# Altium PCB 5811-PA.PcbDoc
Units mil, origin at the board's own origin, x right, y up, seen from the top; angles counter-clockwise.
Board outline 1405.03 x 624.03 mil, 4 copper layers (Top Layer, Internal Plane 1, Signal Layer 1, Bottom Layer), stack 36.417 mil thick; 60 components, 41 nets, 187 pads, 77 vias.
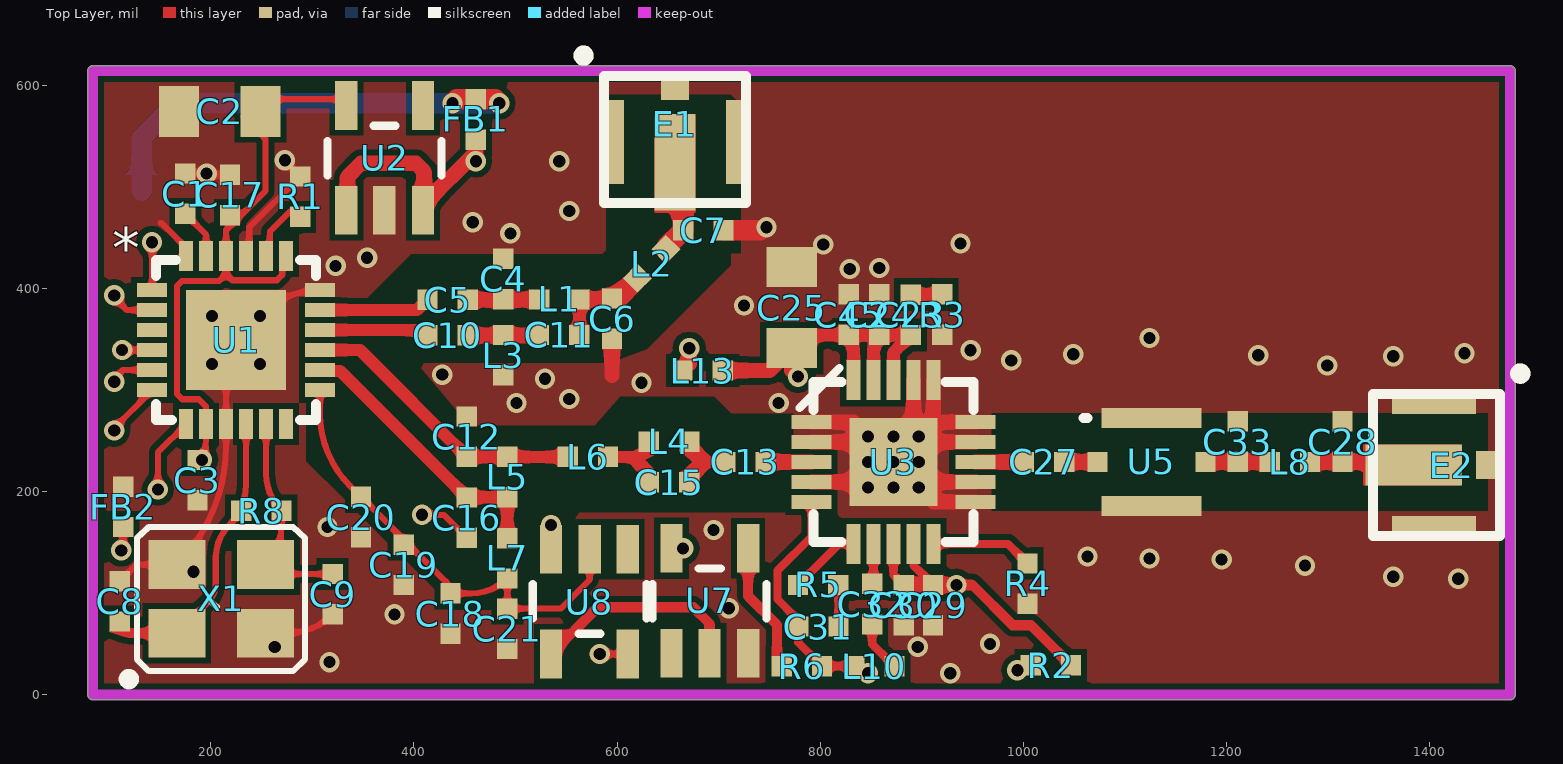
[diagram p0: Top Layer view]
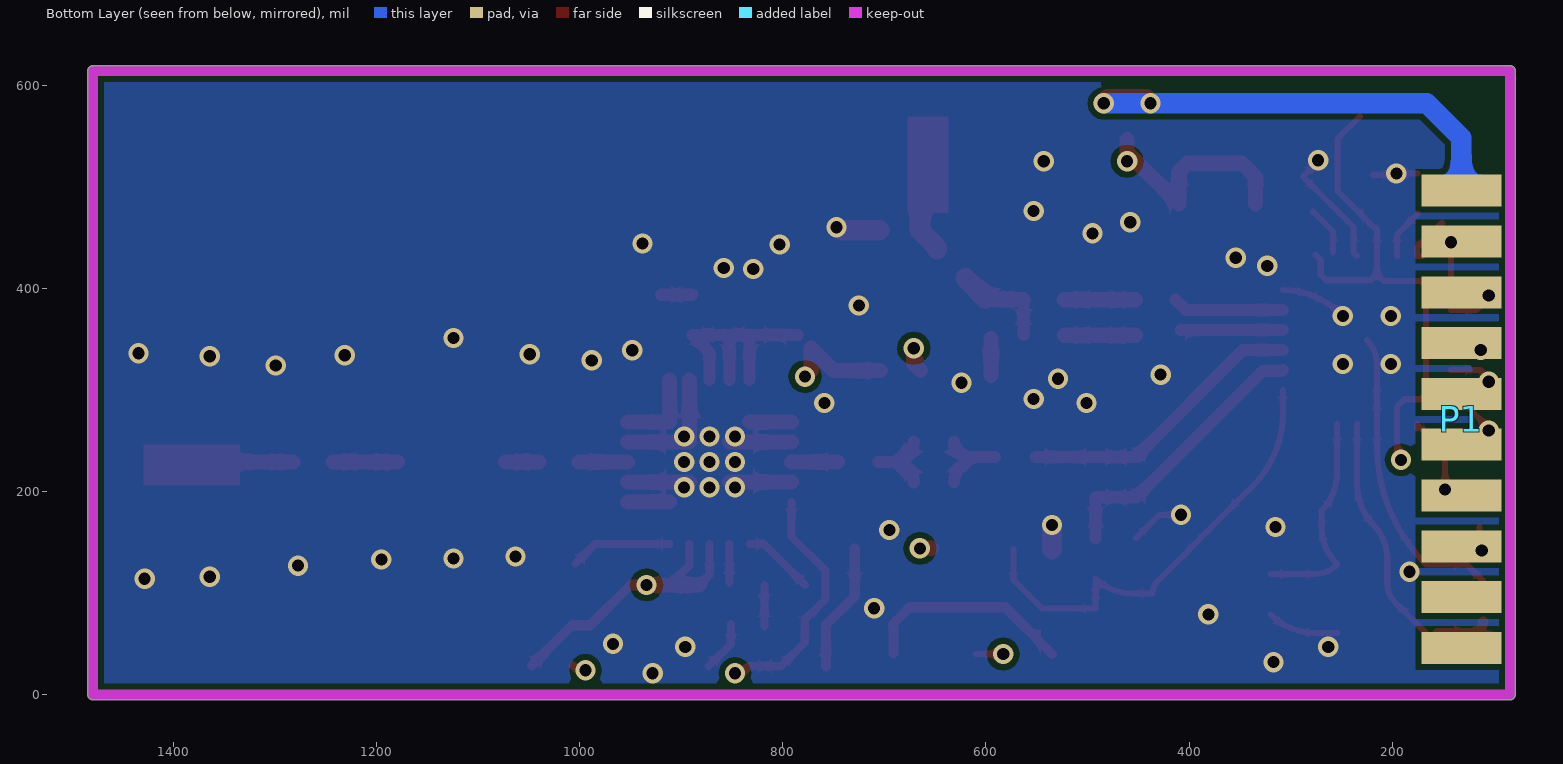
[diagram p1: Bottom Layer view, seen from below]
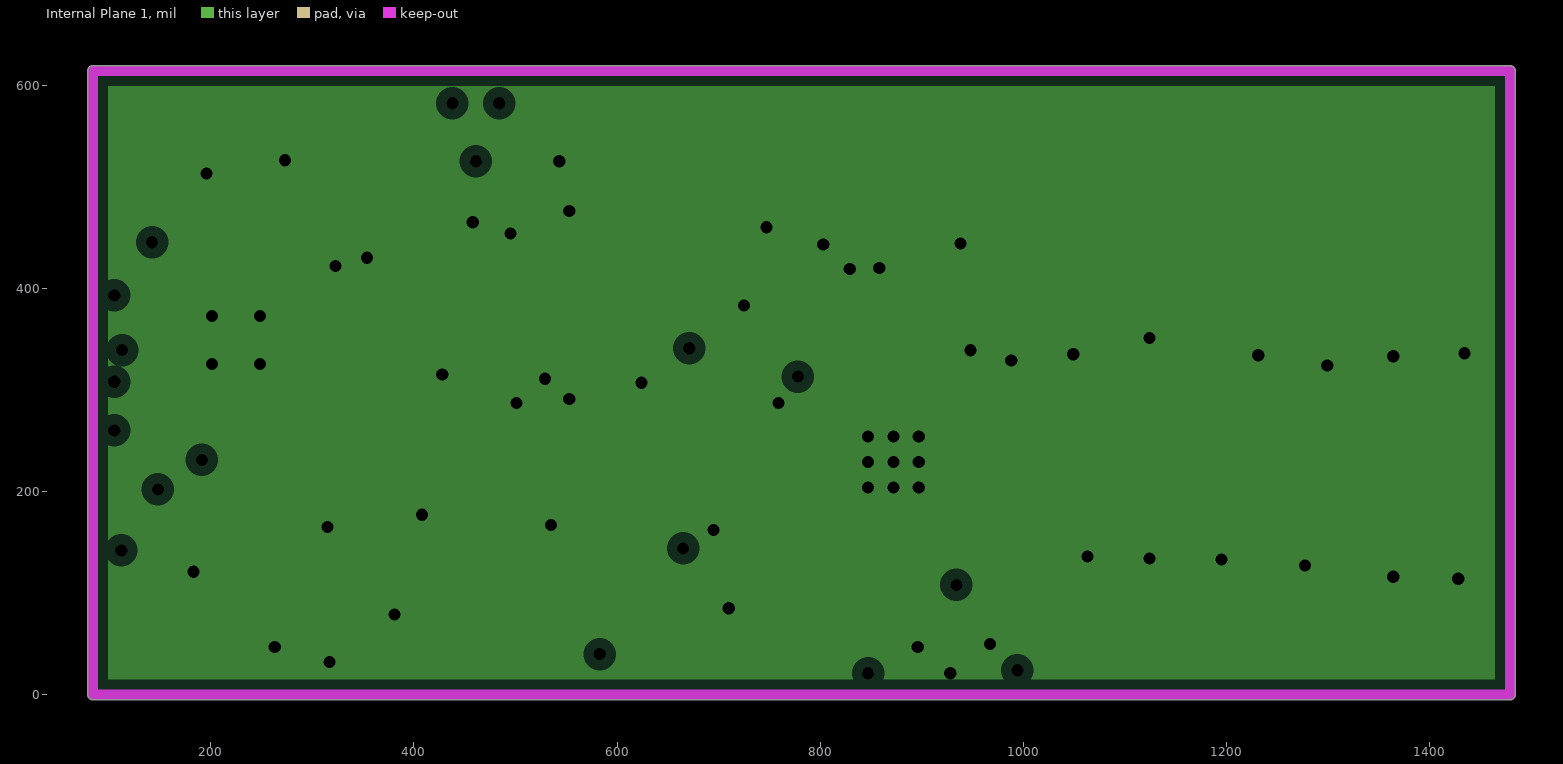
[diagram p2: Internal Plane 1, clearances drawn from the general rule]
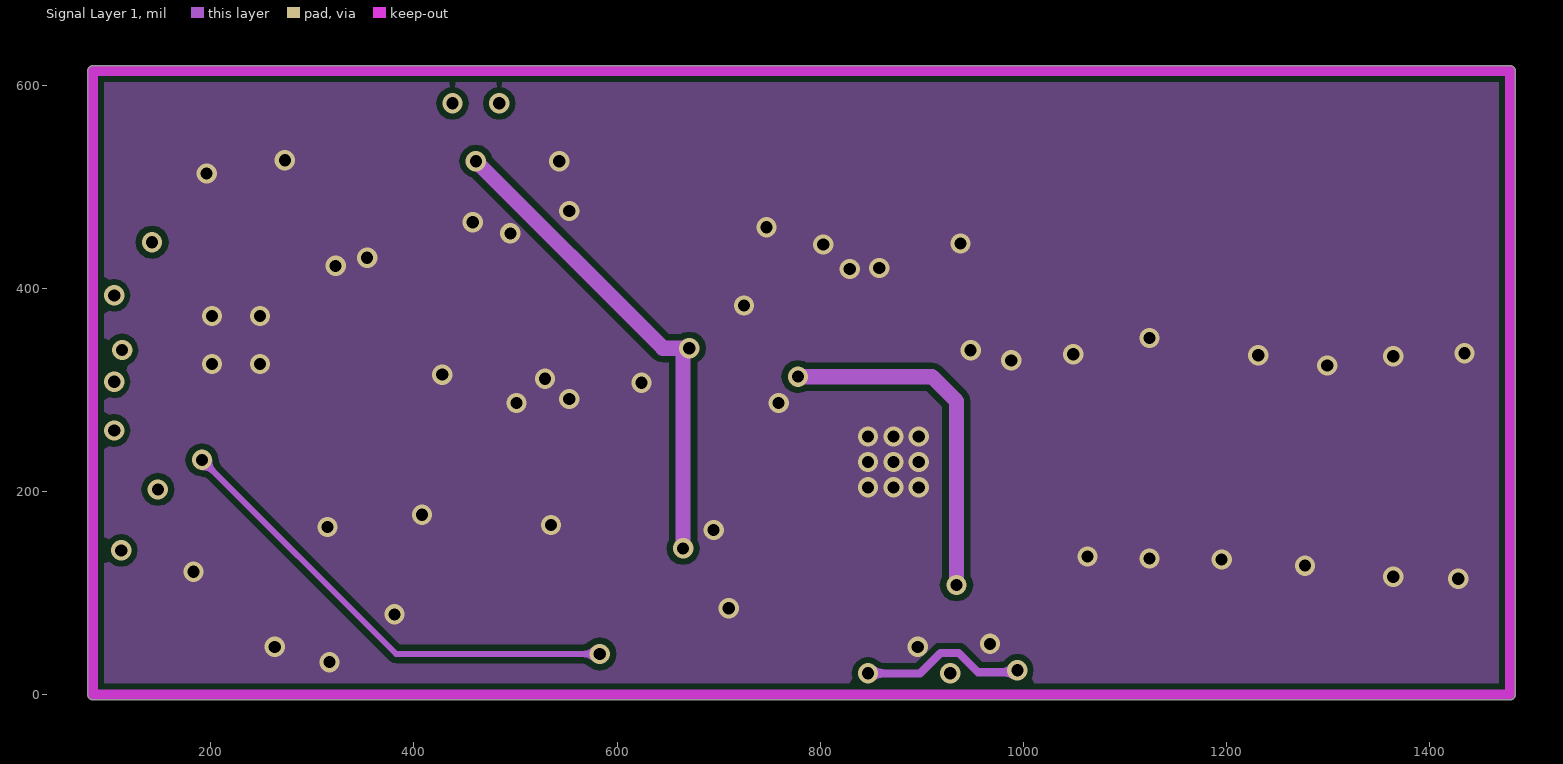
[diagram p3: Signal Layer 1]

## Layer stack, top to bottom
Top Solder: solder mask 0.4, Solder Resist, Dk 3.5
Top Layer: signal copper 0.689
Dielectric 1: prepreg 7.677, FR-4, Dk 4.2
Internal Plane 1: plane copper 0.689, net GND
Dielectric 2: core 18.307, Dk 4.2
Signal Layer 1: signal copper 0.689
Dielectric 3: prepreg 7.677, Dk 4.2
Bottom Layer: signal copper 0.689
Bottom Solder: solder mask 0.4, Solder Resist, Dk 3.5

## Board outline
78.99,0 ccw(c84,0) 84,-5.01 1479,-5.01 ccw(c1479,0) 1484.02,0 1484.02,614 ccw(c1479,614) 1479,619.01 84,619.01 ccw(c84,614) 78.99,614

## Design rules (kind name [scope] priority, off if disabled: settings)
Clearance [All] p1: gap=6
MinimumSolderMaskSliver [All] p1 off: minsoldermaskwidth=10
PlaneClearance [All] p1: clearance=10
PlaneConnect [All] p1: planeconnectstyle=Direct reliefexpansion=20 reliefentries=4 reliefconductorwidth=10 reliefairgap=10
PolygonConnect [All] p1: connectstyle=Direct reliefconductorwidth=10 reliefentries=4 polygonreliefangle="90 Angle" airgapwidth=10
RoomDefinition PA [InComponentClass('PA')] p1 off: confinementstyle=ConfineIn formatcopy=TRUE lockcomponents=FALSE outline 3450,-1911 3670,-1911 3670,-1611 3450,-1611
RoomDefinition BK5811 [InComponentClass('BK5811')] p2 off: confinementstyle=ConfineIn formatcopy=TRUE lockcomponents=FALSE outline 3450,-2291 9750,-2291 9750,-1961 3450,-1961
RoutingVias [All] p1: holewidth=12 width=25 viastyle="Through Hole" minholewidth=12 minwidth=20 maxholewidth=28 maxwidth=50
SilkToSilkClearance [All] p1 off: silktosilkclearance=10
SilkToSolderMaskClearance [IsPad] p1 off: minsilkscreentomaskgap=10 clearancetoexposedcopper=TRUE
SolderMaskExpansion [All] p1: expansion=4
UnpouredPolygon [All] p1: allowunpoured=FALSE
Width [All] p1: maxlimit=20 minlimit=6 preferedwidth=10
24 further rules are at their usual default settings.

## Classes and differential pairs
component class BK5811: C1 C2 C3 C4 C5 C6 C7 C8 C9 C10 C11 C12 C13 C15 C16 C17 C18 C19 C20 C21 FB1 FB2 L1 L2 L3 L4 L5 L6 L7 P1 R1 R8 U1 X1
component class PA: C23 C24 C25 C27 C28 C29 C30 C31 C32 C33 C45 E1 E2 L8 L10 L13 R2 R3 R4 R5 R6 U2 U3 U5 U7 U8

## Components (designator, comment, footprint, x,y, rotation, side; value= is the part's Value field where it differs from the comment)
C1 "33nF" 0402 175,493 r90 top
C2 "22uF" 0805 209,574 r0 top
C3 "0.1uF" 0402 187,211 r90 top
C4 "1pF" 0402 488,409 r90 top
C5 "1pF" 0402 433,388.68 r0 top
C6 "NC" 0402 595,370 r90 top
C7 "NC" 0402 685,457 r180 top
C8 "Cap" 0402 110.55,91.72 r90 top
C9 "Cap" 0402 320,99 r270 top
C10 "1pF" 0402 433,353.68 r0 top
C11 "1pF" 0402 543,354 r180 top
C12 "1pF" 0402 452,254 r270 top
C13 "1pF" 0402 726,229 r0 top
C15 "1pF" 0402 651,209 r0 top
C16 "1pF" 0402 452,174 r90 top
C17 "0.1uF" 0402 219,492 r270 top
C18 "1pF" 0402 436,80 r270 top
C19 "1pF" 0402 390,128 r270 top
C20 "1pF" 0402 348,175 r270 top
C21 "1pF" 0402 492,65 r270 top
C23 "Cap" 0402 889,374 r270 top
C24 "Cap" 0402 858,374 r90 top
C25 "Cap" 0805 772,381 r270 top
C27 "Cap" 0402 1020,229 r0 top
C28 "Cap" 0402 1314,249 r90 top
C29 "Cap" 0402 911,88 r90 top
C30 "Cap" 0402 882,88 r90 top
C31 "Cap" 0402 798,67 r0 top
C32 "Cap" 0402 851,89 r90 top
C33 "Cap" 0402 1211,249 r90 top
C45 "Cap" 0402 828,374 r90 top
E1 "Antenna" IPEX 657,544 r0 top
E2 "Antenna" IPEX 1404,226 r270 top
FB1 "Res2" 0402 461,566 r90 top
FB2 "Res2" 0402 114,185 r270 top
L1 "2nH" 0402 543,389 r0 top
L2 "0R/10P" 0402 634,424 r45 top
L3 "2nH" 0402 488,334 r90 top
L4 "2nH" 0402 651,249 r0 top
L5 "2nH" 0402 492,214 r90 top
L6 "2nH" 0402 571,234 r0 top
L7 "2nH" 0402 492,134 r90 top
L8 "Inductor" 0402 1262,229 r0 top
L10 "Inductor" 0402 853,28 r0 top
L13 "Inductor" 0402 684,319 r0 top
P1 "RFInf" "RFInf - SINGLESIDE" 132,496 r180 bottom
R1 "62K 1%" 0402 288,490 r90 top
R2 "Res2" 0402 1027,29 r180 top
R3 "Res2" 0402 920,374 r90 top
R4 "Res2" 0402 1004,109 r90 top
R5 "Res2" 0402 798,108 r180 top
R6 "Res2" 0402 782,28 r180 top
R8 "Res2" 0402 250,181 r180 top
U1 "BK5811" BK5811 225,349 r0 top
U2 "LP5907" SOT23-5 371,528 r0 top
U3 "SE5004L" SE5004L 872,229 r0 top
U5 "BF2012" LFB2H5 1126,229 r0 top
U7 "schmitt_sot23-5" SOT23-5 691,92 r0 top
U8 "schmitt_sot23-5" SOT23-5 573,92 r180 top
X1 "16Mhz" OSCILLATOR-3.2X2.5 210,94 r0 top

## Footprints (in the part's own frame and the unit in brackets; to place one, negate y for a bottom-side part, rotate by r counter-clockwise, add the part's x,y. Pads: shape width x height; smd on the part's side, far side on the other; paste and mask are expansions set on the pad)
0402 [mil] "0402-RES"
  rect 20x20 smd: 1(-19.68,0) 2(20,0)
0805 [mil]
  rect 39.37x50 smd: 1(-40,0) 2(40,0)
  body extent -50,-30 50,30, height 31
BK5811 [mm]
  rect 2.5x2.5 smd: 0(0,0)
  rect 0.75x0.35 smd: 1(-2.1,1.25) 2(-2.1,0.75) 3(-2.1,0.25) 4(-2.1,-0.25) 5(-2.1,-0.75) 6(-2.1,-1.25) 13(2.1,-1.25) 14(2.1,-0.75) 15(2.1,-0.25) 16(2.1,0.25) 17(2.1,0.75) 18(2.1,1.25)
  rect 0.35x0.75 smd: 7(-1.25,-2.1) 8(-0.75,-2.1) 9(-0.25,-2.1) 10(0.25,-2.1) 11(0.75,-2.1) 12(1.25,-2.1) 19(1.25,2.1) 20(0.75,2.1) 21(0.25,2.1) 22(-0.25,2.1) 23(-0.75,2.1) 24(-1.25,2.1)
  silkscreen extent -2,-2 2,2
IPEX [mil]
  rect 40x95 smd: 1(0,-20)
  rect 19.68x82.68 smd: 2(-60,0) 2(60,0)
  rect 27.56x27.56 smd: 2(0,55)
  Top Layer region: -20,-70 20,-70 20,25 -20,25
  silkscreen extent -95,-60 70,90
LFB2H5 [mm]
  rect 2.5x0.5 smd: 0(0,-1.1) 0(0,1.1)
  rect 0.5x0.5 smd: 1(-1.35,0) 2(1.35,0)
  silkscreen extent -1.7,1.1 -1.6,1.1, body extent -1.25,-1 1.25,1, height 0.9
OSCILLATOR-3.2X2.5 [mil] "OSCILLATOR-3.2X2.5"
  rect 56x48 smd: 1(-43.31,-33.46) 2(44,-33.46) 3(44,34) 4(-43.31,34)
  silkscreen extent -95,-83 83,71
"RFInf - SINGLESIDE" [mm]
  rect 2x0.8 smd: 1(0,0) 2(0,-1.27) 3(0,-2.54) 4(0,-3.81) 5(0,-5.08) 6(0,-6.35) 7(0,-7.62) 8(0,-8.89) 9(0,-10.16) 10(0,-11.43)
SE5004L [mm]
  rect 2.2x2.2 smd: 0(0,0)
  rect 1x0.35 smd: 1(-2.05,1) 2(-2.05,0.5) 3(-2.05,0) 4(-2.05,-0.5) 5(-2.05,-1) 11(2.05,-1) 12(2.05,-0.5) 13(2.05,0) 14(2.05,0.5) 15(2.05,1)
  rect 0.35x1 smd: 6(-1,-2.05) 7(-0.5,-2.05) 8(0,-2.05) 9(0.5,-2.05) 10(1,-2.05) 16(1,2.05) 17(0.5,2.05) 18(0,2.05) 19(-0.5,2.05) 20(-1,2.05)
  silkscreen extent -2.35,-2 2,2.35, body extent -2,-2 2,2, height 0.85
SOT23-5 [mil] "SOT23-5"
  rect 22x48 smd: 1(-37.4,-51.18) 2(0,-51.18) 3(38,-51.18) 4(38,52) 5(-37.4,52)
  silkscreen extent -56,-17 56,32

## Part data
C1 C2 C3 C4 C5 C6 C7 C10 C11 C12 C13 C15 C16 C17 C18 C19 C20 C21: library part Cap, "Capacitor"
C8 C9 C23 C24 C25 C27 C28 C29 C30 C31 C32 C33 C45: "Capacitor"
E1 E2: "Generic Antenna"
FB1 FB2 R2 R3 R4 R5 R6 R8: "Resistor"
L1 L2 L3 L4 L5 L6 L7: library part Inductor, "Inductor"
R1: library part Res2, "Resistor"
X1: library part OSCILLATOR-3.2X2.5, "Crystal Oscillator in 3.2x2.5 SMD"

## Via types
v1: diameter 20, hole 12, Top Layer to Bottom Layer, 59 vias
v2: diameter 20/20/20 (per signal layer), hole 12, Top Layer to Bottom Layer, 18 vias

## Nets (pads, with @x,y where several pads share a name; then routed paths per layer and width w, separated by ;. In a path a pad name is that pad's centre, name@x,y a point inside that pad or via, vN(x,y) a via of type N, cw(c..) or ccw(c..) an arc to the next point about the centre after c; other vN are vias at no path point)
3.3NRF: C2.2 C3.2 C17.2 U1.8 U1.19 U1.22 U2.5 U8.5 | length 1085.8
  Top Layer w6: C3.2@191.42,225.42 v1(191.42,231.07) ccw(c142.65,251.35) 195.47,251.35 U1.8 195.47,283.53 188.21,290.79 172.06,290.79 166.79,296.06 166.79,401.94 172.06,407.21 208.21,407.21 215.16,414.16 ; C2.2@232,569 254,547 254,496 215.16,457.16 U1.22 215.16,414.16 ; C2.2@261,586 U2.5@334.6,586 ; U1.19@275.71,433.18 U1.19 270.42,427.88 270.42,413.19 265.15,407.91 221.4,407.91 215.16,414.16 ; v1(583,40) U8.5
  Signal Layer 1 w6: v1(191.42,231.07) 382.49,40 v1(583,40)
5V: FB1.1 L13.1 U2.1 U2.3 U7.5 | length 752.1
  Top Layer w15: U2.1@334.6,482.82 334.6,509.6 348,523 402,523 410,515 410,482.82 v1@461,533.82 ; v1(461,525) v1@461,533.82 ; FB1.1 v1@461,533.82 ; U7.5 v1(665,144) ; L13.1 671,325.68 v1(671,341) v1@669,341
  Signal Layer 1 w15: v1(461,525) 645,341 v1(671,341) ; v1(665,144) v1@665,335
CE: P1.2 U1.1 | length 47.1
  Top Layer w6: U1.1 v1(142.32,445.32)
CSN: P1.3 U1.2 | length 50.2
  Top Layer w6: v1(105,393) 104.94,393.06 103,393.06 117.53,378.53 U1.2
  Bottom Layer w6: P1.3@103,395 v1(105,393)
GND: C1.2 C2.1 C3.1 C4.2 C6.1 C7.1 C8.2 C9.2 C12.1 C16.1 C17.1 C18.2 C19.2 C20.2 C21.2 C24.2 C25.1 C28.2 C29.1 C30.1 C33.2 C45.2 E1.2 E2.2 FB2.1 L3.1 R1.2 R3.1 R4.1 U1.0 U1.9 U1.18 U1.21 U1.24 U2.2 U3.0 U3.1 U3.2 U3.4 U3.11 U3.12 U3.14 U3.15 U3.16 U3.17 U5.0 U7.3 U8.3 X1.2 X1.4 | length 1272.4
  Top Layer w6: C8.2 126.83,128 X1.4 ccw(c49.69,245) 215.16,245 U1.9 215.16,325.24 cw(c248.76,325.24) U1.0 ; 150.68,464.32 151.26,464.32 175.79,439.8 U1.24 U1.24@170.32,431.68 ; C1.2 v1(196,513) ; v1@197.32,511.68 C17.1 ; U1.21 238,434.83 238,460 R1.2 272,526 v1(273,526) ; v2(248.62,372.62) 250.55,374.55 cw(c307.68,317.42) U1.18 ; X1.2 275.42,60.54 ccw(c275.42,123.58) C9.2 ; v1(408,177) 429.32,177 C16.1
  Top Layer w15: 595,314 C6.1 ; U3.4 U3.0@852.31,209.32 ; U3.2 U3.0@852.31,248.68 ; U3.1 U3.0@832.63,268.37 ; U3.0@891.69,209.32 U3.12 ; U3.17 891.69,248.68 U3.14 ; U3.0@911.37,189.63 U3.11 ; U3.16 911.37,268.37 U3.15
  Top Layer w20: U8.3 v1(535,167) ; C7.1 v1@741,457
  other v1: 928,21 317,32 263,47 896,47 967,50 710,85 1428,114 1364,116 183,121 1277,127 1124,134 1063,136 695,162 315,165 501,287 759,287 553,291 624,307 529,311 428,315 988,329 1364,333 1231,334 1434,336 948,339 1124,351 829,419 858,420 323,422 354,430 803,443 938,444 495,454 747,460 458,465 553,476 543,525
  other v2: 381,79 1195,133 847,204 872,204 897,204 847,229 872,229 897,229 847,254 872,254 897,254 1299,324 201.38,325.38 248.62,325.38 1049,335 201.38,372.62 725,383
IRQ: P1.7 U1.7 | length 80.4
  Top Layer w6: v1(148,202) 148,238.54 U1.7 U1.7@175.79,261.79
MISO: P1.6 U1.6 | length 58.7
  Top Layer w6: v1(105,260) 102.54,260 U1.6
MOSI: P1.5 U1.5 | length 48.1
  Top Layer w6: v1(105,308) 102,308 113.47,319.47 U1.5
NetC1_1: C1.1 U1.23 | length 50.1
  Top Layer w6: C1.1 195.47,452.84 U1.23
NetC4_1: C4.1 C5.2 L1.1 | length 70.4
  Top Layer w6: L1.1@523,388.68 L1.1
  Top Layer w15: C5.2 L1.1@523,388.68
NetC5_1: C5.1 U1.17 | length 109.8
  Top Layer w12: U1.17 403.16,378.53 C5.1
NetC6_2: C6.2 C11.1 L1.2 L2.1 | length 100
  Top Layer w6: L1.2@562.69,388.68 L1.2
  Top Layer w12: C11.1 563,354.32 L1.2
  Top Layer w15: L1.2 C6.2@594,389 ; C6.2 C6.2@600,390
  Top Layer w20: C6.2@600,390 L2.1
NetC7_2: C7.2 E1.1 L2.2 | length 84.8
  Top Layer w20: L2.2 648.14,440.14 C7.2 E1.1@665,516
NetC8_1: C8.1 R8.2 U1.10 X1.1 | length 280.1
  Top Layer w6: X1.1 197.82,91.66 ccw(c180.48,109) 205,109 205,135.32 cw(c248.68,135.32) 217.79,166.21 ccw(c176.63,207.37) 234.84,207.37 U1.10
  Top Layer w10: C8.1 ccw(c122.05,72.03) 122.05,60.54 X1.1@155.55,60.54
NetC9_1: C9.1 R8.1 U1.11 X1.3 | length 216.5
  Top Layer w6: X1.3@254.53,129.27 cw(c252.73,129.27) X1.3 ; U1.11 254.53,217.59 ccw(c306.28,217.59) R8.1 269.68,165.87 cw(c216.13,165.87) X1.3 ; C9.1 276.49,118.68 cw(c276.49,150.49) X1.3
NetC10_1: C10.1 U1.16 | length 100.5
  Top Layer w12: U1.16 C10.1@408.16,358.84
NetC10_2: C10.2 C11.2 L3.2 | length 70.1
  Top Layer w6: C11.2@522.69,353.68 C11.2
  Top Layer w15: C10.2 C11.2@522.69,353.68
NetC12_2: C12.2 L5.2 L6.1 U1.15 | length 291.4
  Top Layer w6: C12.2@449,231 C12.2
  Top Layer w12: U1.15 346.84,339.16 C12.2 L5.2 L6.1
NetC13_1: C13.1 C15.2 L4.2 | length 78.1
  Top Layer w12: C15.2 cw(c691,209) 691,229 ; L4.2 ccw(c691,249) 691,229 ; C13.1 691,229
NetC13_2: C13.2 U3.3 | length 45.3
  Top Layer w15: C13.2 U3.3
NetC15_1: C15.1 L4.1 L6.2 | length 88.1
  Top Layer w12: L6.2 606.31,234 ; C15.1 ccw(c606.31,209) 606.31,234 ; L4.1 cw(c616.31,249) 616.31,234 606.31,234
NetC16_2: C16.2 L5.1 L7.2 U1.14 | length 281.6
  Top Layer w6: C16.2@449,197 C16.2 ; 463.68,198 464,198.32
  Top Layer w12: U1.14 308.47,318.68 327.41,318.68 C16.2@452,194.09 ; C16.2 C16.2@452,194.09 ; L7.2 L5.1 452,194.32 C16.2@452,194.09
NetC18_1: C18.1 C19.1 C20.1 C21.1 L7.1 U1.13 U8.2 | length 460.7
  Top Layer w6: U1.13 307.68,276.43 ccw(c407.68,276.43) 336.97,205.72 C20.1 431.05,111.63 cw(c419.1,99.68) C18.1 456.68,99.68 ccw(c456.68,149.63) L7.1 C21.1 544.69,84.68 573,113 U8.2
NetC23_1: C23.1 R3.2 | length 30.7
  Top Layer w12: C23.1 R3.2@919.69,393.68
NetC27_1: C27.1 U3.13 | length 47.6
  Top Layer w15: U3.13 C27.1
NetC27_2: C27.2 U5.1 | length 32.9
  Top Layer w15: C27.2 U5.1
NetC28_1: C28.1 E2.1 L8.2 | length 99
  Top Layer w15: L8.2 E2.1@1381,229
NetC31_2: C31.2 R5.1 | length 40.7
  Top Layer w8: C31.2 R5.1@818,107.68
NetC32_1: C32.1 L10.2 | length 50.4
  Top Layer w8: C32.1 851,50 L10.2
NetC32_2: C32.2 U3.7 | length 38
  Top Layer w8: C32.2@852.31,110.32 U3.7
NetC33_1: C33.1 L8.1 U5.2 | length 63.2
  Top Layer w15: U5.2 L8.1
NetFB1_2: FB1.2 P1.1 | length 467.4
  Top Layer w20: v1(438,582) 442,586 FB1.2 480,586 v1(484,582)
  Bottom Layer w20: P1.1 132,548 166,582 v1(438,582) v1(484,582)
NetFB2_2: FB2.2 P1.8 | length 31.8
  Top Layer w6: v1(112,142) 114,140 FB2.2
  Bottom Layer w6: P1.8@112,138 v1(112,142)
NetR1_1: R1.1 U1.20 | length 48
  Top Layer w6: U1.20@258.32,435.47 258.32,455.64 R1.1@278,475.32
NetR4_2: R4.2 U3.10 | length 100.6
  Top Layer w8: U3.10 984.71,148.29 R4.2
NetR5_2: R5.2 U3.6 | length 71.3
  Top Layer w8: R5.2 818.29,148.29 U3.6
NetR6_2: R6.2 U7.4 | length 127.7
  Top Layer w10: U7.4 729,97 757.31,68.68 R6.2@757.31,28
NetU7_2: U7.2 U8.4 | length 210.9
  Top Layer w10: U8.4 581,86 675,86 691,70 U7.2
SCK: P1.4 U1.4 | length 29.5
  Top Layer w6: v1(112.84,339.16) U1.4
VPA: C23.2 C24.1 C25.2 C29.2 C30.2 C45.1 L13.2 R2.1 U3.8 U3.9 U3.18 U3.19 U3.20 | length 986.9
  Top Layer w8: U3.8 872,118 C30.2 ; U3.9 891.69,127.26 910.94,108 C29.2
  Top Layer w10: v1(934,108) 949.76,108 989.44,68.32 1007.37,68.32 R2.1
  Top Layer w12: C25.2@785,354 C24.1@857.69,354 ; U3.20 C45.1@832.63,349.68 ; U3.19 852.31,348.63 C24.1@857.69,354 ; C24.1 C24.1@857.69,354 ; U3.18 872,337 C23.2 C24.1@857.69,354
  Top Layer w15: L13.2 750,319 C25.2 772,319 v1(778,313) ; C30.2 C29.2@910.94,108 ; C29.2 v1(934,108)
  Signal Layer 1 w15: v1(778,313) 910,313 934,289 v1(934,108)
VREF: C31.1 L10.1 R2.2 R6.1 U3.5 | length 430.4
  Top Layer w8: U3.5 791.29,155.43 758,122.14 758,93.86 778.31,73.54 C31.1 778.31,51.37 R6.1 L10.1 845.31,16 v1@846.97,16 ; v1@847,16.03 v1(847,21) ; v1(994,24) 1002,24 R2.2
  Signal Layer 1 w8: v1(847,21) 898.28,21 918.28,41 936.28,41 955.28,22 995,22 994,23 v1(994,24)
pads on no net: P1.9 P1.10 U1.3 U1.12 U2.4 U7.1 U8.1

## Polygon pours and split planes (outlines as drawn)
GND on Top Layer "Top Layer-No Net" (solid, remove dead copper, pour order 3): 84,614 1479,614 1479,0 84,0
GND on Bottom Layer "Top Layer-No Net" (solid, remove dead copper, pour order 5): 84,614 1479,614 1479,0 84,0
GND on Signal Layer 1 "Top Layer-No Net" (solid, remove dead copper, pour order 7): 84,614 1479,614 1479,13 1472,6 1466,0 84,0
GND on Internal Plane 1 (split plane): 1463.92,15.08 99.08,15.08 99.08,598.92 1463.92,598.92

## Keep-outs
Keep-Out Layer:
  lines w10: 84,0 1479,0 1479,614 84,614 84,0

## Other copper
Top Layer:
  pour cut-out: 589,434 722,434 722,581 712,591 589,591
  pour cut-out: 293.71,388.4 293.71,229.94 440.75,82.89 554.73,82.89 554.73,179 774,179 774,277 712.39,277 695.87,293.52 603.16,293.52 578.25,264.98 454.4,264.98 403.66,326 591.74,326 629.63,340 712.39,422.76 712.39,434 397.38,434 351.78,388.4
  pour cut-out: 969,277 969,181 1457,181 1457,277

## Silkscreen, mask and mechanical layers (free items; w line width, h text height)
Bottom Solder:
  rectangle: 682,124 1073,296

## Text inside footprints (layer, text, board x,y; h text height)
U1: Top Overlay "*" at 102.95,419.87 h40